# Altium PCB PCB_ASCII.PcbDoc
Units mil, origin at the board's own origin, x right, y up, seen from the top; angles counter-clockwise.
Board outline 2352.2 x 2352.2 mil, 2 copper layers (Top Layer, Bottom Layer); 85 components, 59 nets, 353 pads, 49 vias.
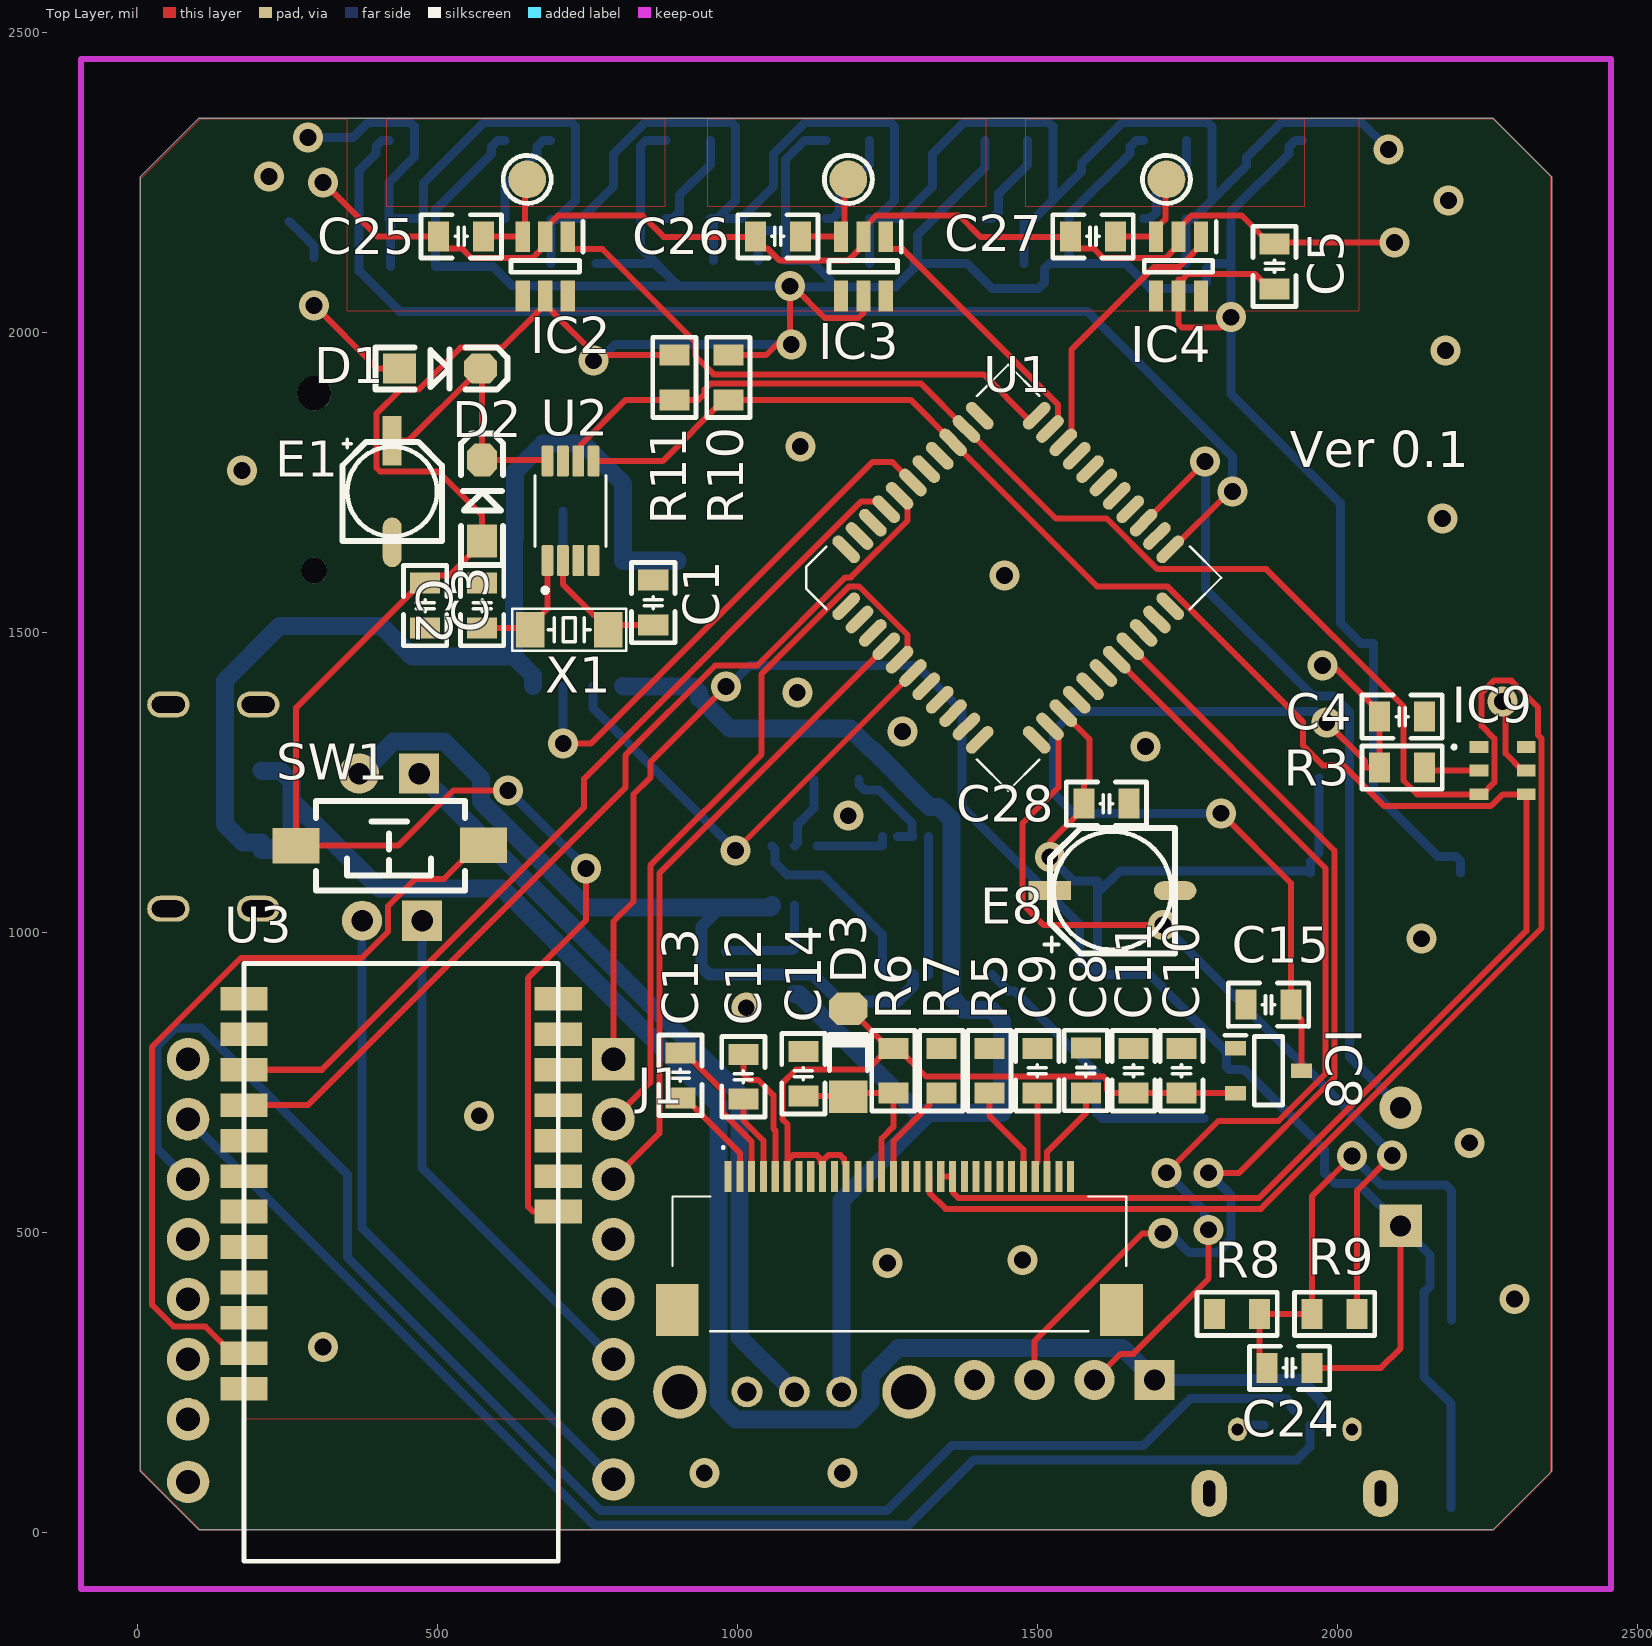
[diagram p0: Top Layer view]
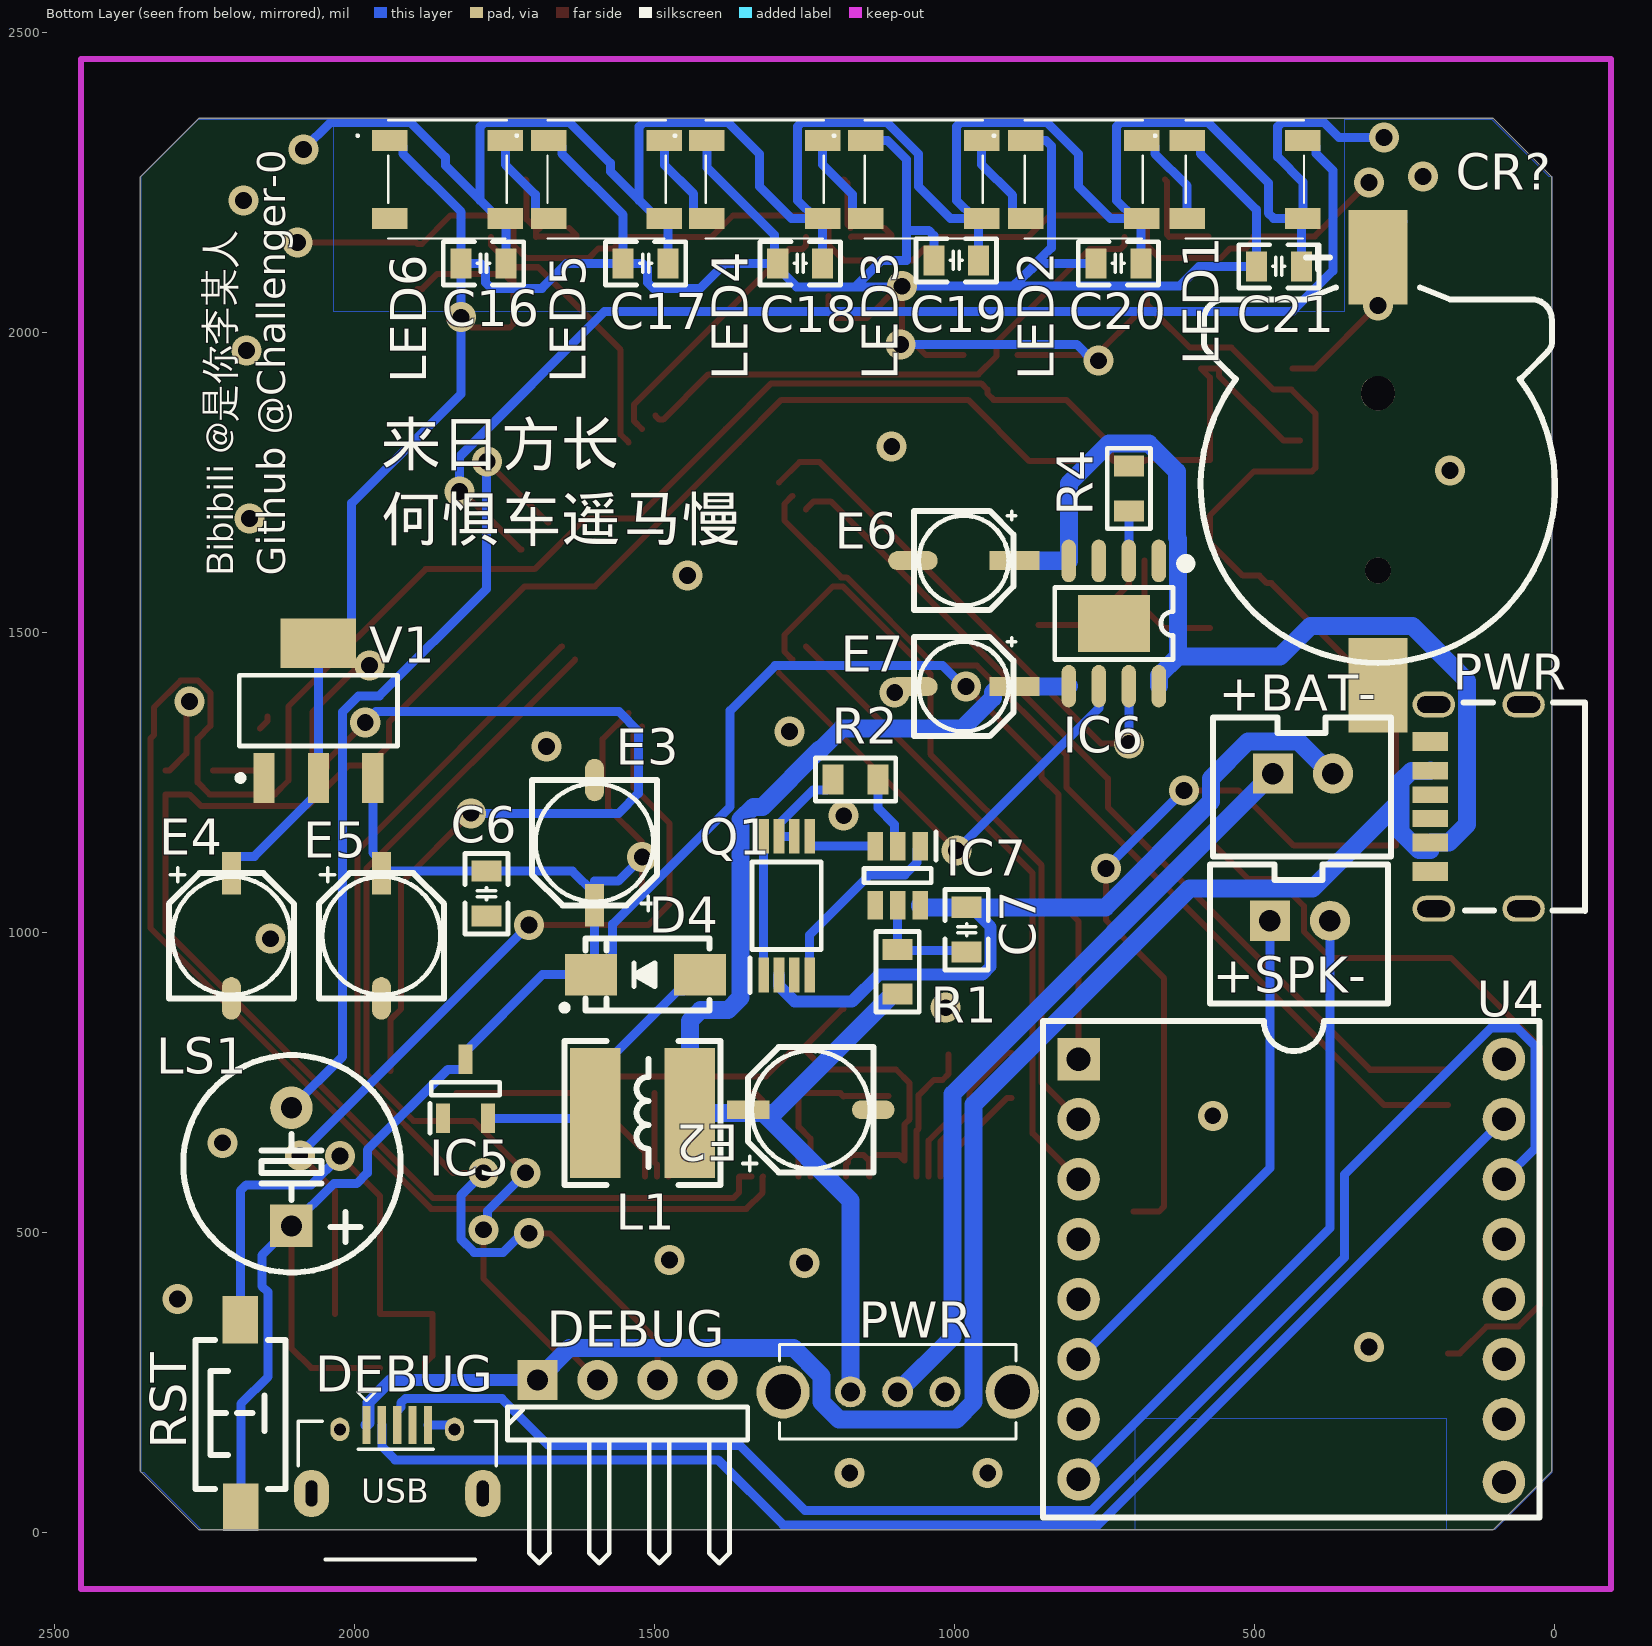
[diagram p1: Bottom Layer view, seen from below]

## Layer stack, top to bottom
Top Solder: solder mask 0.4, Solder Resist, Dk 3.5
Top Layer: signal copper 1.4
Dielectric 1: dielectric 12.6, FR-4, Dk 4.8
Bottom Layer: signal copper 1.4
Bottom Solder: solder mask 0.4, Solder Resist, Dk 3.5

## Board outline
5,103.43 5,2258.78 103.43,2357.2 2258.78,2357.2 2357.2,2258.78 2357.2,103.43 2258.78,5 103.43,5

## Design rules (kind name [scope] priority, off if disabled: settings)
AssemblyTestPointUsage [All] p0: scope1count=1 scope1_0_kind=Board scope1_0_value=Board scope2count=1 scope2_0_kind=Board scope2_0_value=Board commentlength=0
AssemblyTestpoint [All] p0: scope1count=1 scope1_0_kind=Board scope1_0_value=Board scope2count=1 scope2_0_kind=Board scope2_0_value=Board commentlength=0
Clearance Clearance_1 [All] p0 off: scope1count=1 scope1_0_kind=Board scope1_0_value=Board scope2count=1 scope2_0_kind=Board scope2_0_value=Board commentlength=44 gap=5 // Protel DXP Scope 2 Expression Was: IsPad
Clearance PadToPad [All] p0 off: scope1count=1 scope1_0_kind=Board scope1_0_value=Board scope2count=1 scope2_0_kind=Board scope2_0_value=Board commentlength=44 gap=5 // Protel DXP Scope 2 Expression Was: IsPad
Clearance [All] p0: scope1count=1 scope1_0_kind=Board scope1_0_value=Board scope2count=1 scope2_0_kind=Board scope2_0_value=Board commentlength=0 gap=5
Clearance Clearance_1 [IsNet vs IsPad] p1: gap=5 ignorepadtopadclearanceinfootprint=FALSE
Clearance PadToPad [IsPad vs IsPad] p2: gap=5 ignorepadtopadclearanceinfootprint=FALSE
Clearance [All] p3: gap=5 ignorepadtopadclearanceinfootprint=FALSE
ComponentClearance [All] p0: scope1count=1 scope1_0_kind=Board scope1_0_value=Board scope2count=1 scope2_0_kind=Board scope2_0_value=Board commentlength=0 gap=10 collisioncheckmode=3
DiffPairsRouting [All] p0: scope1count=1 scope1_0_kind=Board scope1_0_value=Board scope2count=1 scope2_0_kind=Board scope2_0_value=Board commentlength=0
FabricationTestPointUsage [All] p0: scope1count=1 scope1_0_kind=Board scope1_0_value=Board scope2count=1 scope2_0_kind=Board scope2_0_value=Board commentlength=0 valid=0 allowmultiple=FALSE
FabricationTestpoint [All] p0: scope1count=1 scope1_0_kind=Board scope1_0_value=Board scope2count=1 scope2_0_kind=Board scope2_0_value=Board commentlength=0 side=3 testpointundercomponent=TRUE minsize=40 maxsize=100 preferedsize=60 minholesize=0 maxholesize=40 preferedholesize=32 testpointgrid=1
FanoutControl Fanout_BGA [All] p0 off: scope1count=1 scope1_0_kind=Board scope1_0_value=Board scope2count=1 scope2_0_kind=Board scope2_0_value=Board commentlength=69 // Protel DXP Scope 1 Expression Was: IsBGA   Fanout_BGA (Default Rule)
FanoutControl Fanout_LCC [All] p0 off: scope1count=1 scope1_0_kind=Board scope1_0_value=Board scope2count=1 scope2_0_kind=Board scope2_0_value=Board commentlength=69 // Protel DXP Scope 1 Expression Was: IsLCC   Fanout_LCC (Default Rule)
FanoutControl Fanout_SOIC [All] p0 off: scope1count=1 scope1_0_kind=Board scope1_0_value=Board scope2count=1 scope2_0_kind=Board scope2_0_value=Board commentlength=71 // Protel DXP Scope 1 Expression Was: IsSOIC   Fanout_SOIC (Default Rule)
FanoutControl Fanout_Small [All] p0 off: scope1count=1 scope1_0_kind=Board scope1_0_value=Board scope2count=1 scope2_0_kind=Board scope2_0_value=Board commentlength=84 // Protel DXP Scope 1 Expression Was: (CompPinCount < 5)   Fanout_Small (Default Rule)
FanoutControl Fanout_Default [All] p0: scope1count=1 scope1_0_kind=Board scope1_0_value=Board scope2count=1 scope2_0_kind=Board scope2_0_value=Board commentlength=30 // Fanout_Default (Default Rule)
Height [All] p0: scope1count=1 scope1_0_kind=Board scope1_0_value=Board scope2count=1 scope2_0_kind=Board scope2_0_value=Board commentlength=0
HoleSize [All] p0: scope1count=1 scope1_0_kind=Board scope1_0_value=Board scope2count=1 scope2_0_kind=Board scope2_0_value=Board commentlength=0 absolutevalues=TRUE maxlimit=100 minlimit=1 maxpercent=80.000 minpercent=20.000
HoleToHoleClearance [All] p0: scope1count=1 scope1_0_kind=Board scope1_0_value=Board scope2count=1 scope2_0_kind=Board scope2_0_value=Board commentlength=0
LayerPairs [All] p0: scope1count=1 scope1_0_kind=Board scope1_0_value=Board scope2count=1 scope2_0_kind=Board scope2_0_value=Board commentlength=0 enforce=TRUE
MinimumSolderMaskSliver [All] p0: scope1count=1 scope1_0_kind=Board scope1_0_value=Board scope2count=1 scope2_0_kind=Board scope2_0_value=Board commentlength=0
MinimumSolderMaskSliver [All] p1: minsoldermaskwidth=2
NetAntennae [All] p0: scope1count=1 scope1_0_kind=Board scope1_0_value=Board scope2count=1 scope2_0_kind=Board scope2_0_value=Board commentlength=0
PasteMaskExpansion [All] p0: scope1count=1 scope1_0_kind=Board scope1_0_value=Board scope2count=1 scope2_0_kind=Board scope2_0_value=Board commentlength=0 expansion=0
PlaneClearance [All] p0: scope1count=1 scope1_0_kind=Board scope1_0_value=Board scope2count=1 scope2_0_kind=Board scope2_0_value=Board commentlength=0 clearance=20
PlaneConnect [All] p0: scope1count=1 scope1_0_kind=Board scope1_0_value=Board scope2count=1 scope2_0_kind=Board scope2_0_value=Board commentlength=0 planeconnectstyle=Relief reliefexpansion=20 reliefentries=4 reliefconductorwidth=10 reliefairgap=10
PolygonConnect [All] p0: scope1count=1 scope1_0_kind=Board scope1_0_value=Board scope2count=1 scope2_0_kind=Board scope2_0_value=Board commentlength=0 connectstyle=Relief reliefconductorwidth=10 reliefentries=4 polygonreliefangle="90 Angle"
PolygonConnect [All] p1: connectstyle=Relief reliefconductorwidth=10 reliefentries=4 polygonreliefangle="90 Angle" airgapwidth=10
RoutingCorners [All] p0: scope1count=1 scope1_0_kind=Board scope1_0_value=Board scope2count=1 scope2_0_kind=Board scope2_0_value=Board commentlength=0 cornerstyle=45-Degree minsetback=100 maxsetback=100
RoutingLayers [All] p0: scope1count=1 scope1_0_kind=Board scope1_0_value=Board scope2count=1 scope2_0_kind=Board scope2_0_value=Board commentlength=0 top layer=Automatic bottom layer=Automatic
RoutingPriority [All] p0: scope1count=1 scope1_0_kind=Board scope1_0_value=Board scope2count=1 scope2_0_kind=Board scope2_0_value=Board commentlength=0
RoutingTopology [All] p0: scope1count=1 scope1_0_kind=Board scope1_0_value=Board scope2count=1 scope2_0_kind=Board scope2_0_value=Board commentlength=0 topology=Shortest
RoutingVias [All] p0: scope1count=1 scope1_0_kind=Board scope1_0_value=Board scope2count=1 scope2_0_kind=Board scope2_0_value=Board commentlength=0 holewidth=28 width=50 viastyle="Through Hole" minholewidth=28 minwidth=50 maxholewidth=28 maxwidth=50
RoutingVias [All] p1: holewidth=28 width=50 viastyle="Through Hole" minholewidth=28 minwidth=50 maxholewidth=28 maxwidth=50
ShortCircuit [All] p0: scope1count=1 scope1_0_kind=Board scope1_0_value=Board scope2count=1 scope2_0_kind=Board scope2_0_value=Board commentlength=0 allowed=FALSE
SilkToBoardRegionClearance [All] p0: scope1count=1 scope1_0_kind=Board scope1_0_value=Board scope2count=1 scope2_0_kind=Board scope2_0_value=Board commentlength=0
SilkToSilkClearance [All] p0: scope1count=1 scope1_0_kind=Board scope1_0_value=Board scope2count=1 scope2_0_kind=Board scope2_0_value=Board commentlength=0
SilkToSilkClearance [All] p1: silktosilkclearance=0
SilkToSolderMaskClearance [All] p0 off: scope1count=1 scope1_0_kind=Board scope1_0_value=Board scope2count=1 scope2_0_kind=Board scope2_0_value=Board commentlength=44 // Protel DXP Scope 1 Expression Was: IsPad
SilkToSolderMaskClearance [IsPad] p1: minsilkscreentomaskgap=0 clearancetoexposedcopper=TRUE
SolderMaskExpansion [All] p0: scope1count=1 scope1_0_kind=Board scope1_0_value=Board scope2count=1 scope2_0_kind=Board scope2_0_value=Board commentlength=0 expansion=4
SolderMaskExpansion [All] p1: expansion=4 istentingtop=FALSE
UnRoutedNet [All] p0: scope1count=1 scope1_0_kind=Board scope1_0_value=Board scope2count=1 scope2_0_kind=Board scope2_0_value=Board commentlength=0
UnpouredPolygon [All] p0: scope1count=1 scope1_0_kind=Board scope1_0_value=Board scope2count=1 scope2_0_kind=Board scope2_0_value=Board commentlength=0
Width [All] p0: scope1count=1 scope1_0_kind=Board scope1_0_value=Board scope2count=1 scope2_0_kind=Board scope2_0_value=Board commentlength=0 maxlimit=50 minlimit=10 preferedwidth=30
Width [All] p1: maxlimit=50 minlimit=10 preferedwidth=30 toplayer_maxwidth=20 toplayer_prefwidth=10 minimp=50.000000 maximp=50.000000 favimp=50.000000
27 further rules are at their usual default settings.

## Classes and differential pairs
component class Sheet1: +BAT- +SPK- C1 C3 C4 C5 C6 C7 C8 C9 C10 C11 C12 C13 C14 C15 C16 C17 C18 C19 C20 C21 C24 C25 C26 C27 C28 CR? D1 D2 D3 D4 DEBUG E1 E2 E3 E4 E5 E6 E7 E8 IC2 IC3 IC4 IC5 IC6 IC7 IC8 IC9 J1 L1 LED1 LED2 LED3 LED4 LED5 LED6 LS1 PWR pwr Q1 R1 R2 R3 R4 R5 R6 R7 R8 R9 R10 R11 RST SW1 U1 U2 U3 U4 V1 X1

## Components (designator, comment, footprint, x,y, rotation, side; value= is the part's Value field where it differs from the comment)
+BAT- "HDR-1X2" XH2.54-LI-2P 420,1265 r180 bottom (schematic designator JP_BAT)
+SPK- "HDR-1X2" XH2.54-LI-2P 425,1020 r180 bottom (schematic designator JP_SPK)
C1 "15P" C0805_L 860,1550 r270 top
C2 "15P" C0805_L 575,1545 r90 top
C3 "104" C0805_L 480,1545 r90 top
C4 "104" C0805_L 2107.6,1360 r180 top
C5 "104" C0805_L 1895,2110 r270 top
C6 "104" C0805_L 1780,1065 r90 bottom
C7 "104" C0805_L 980,1005 r270 bottom
C8 "2.2uF" C0805_L 1580.64,770.43 r270 top
C9 "4.7uF" C0805_L 1500,770 r270 top
C10 "1uF" C0805_L 1740,770 r270 top
C11 "1uF" C0805_L 1660,770 r270 top
C12 "1uF" C0805_L 1010,760 r90 top
C13 "1uF" C0805_L 905,762.4 r90 top
C14 "4.7uF" C0805_L 1110,765 r270 top
C15 "104" C0805_L 1885,880 r0 top
C16 "104" C0805_L 1785,2115 r180 bottom
C17 "104" C0805_L 1515,2115 r180 bottom
C18 "104" C0805_L 1257.4,2115 r180 bottom
C19 "104" C0805_L 997.4,2120 r180 bottom
C20 "104" C0805_L 727.4,2115 r180 bottom
C21 "104" C0805_L 460,2110 r180 bottom
C24 "10uF" C0805_L 1920,275 r180 top
C25 "104" C0805_L 540,2160 r180 top
C26 "104" C0805_L 1067.6,2160 r180 top
C27 "104" C0805_L 1592.6,2160 r180 top
C28 "104" C0805_L 1615,1215 r0 top
CR? "1220" CR1220_A 295,1745 r90 bottom
D1 "稳压二极管" SOD-123 505,1940 r0 top
D2 "稳压二极管" SOD-123 575,1720 r90 top
D3 "1N4148" "MINI_MELF (LL34)" 1185,800 r90 top
D4 "SS14" SMA 1515,930 r0 bottom
DEBUG "USB2.0_Micro-B" USB2.0_MICRO-B_1 1928.82,65.83 r180 bottom (schematic designator MP3Player_Debug)
DEBUG "HDR-1X4" HDR2.54-WI-4P 1545,255 r180 bottom (schematic designator JP_DEBUG)
E1 "10uF/16V" "CE B(4*5.4)" 425,1735 r90 top
E2 "47uF/16V" "CE C(5*5.4)" 1240,705 r0 bottom
E3 "47uF/16V" "CE C(5*5.4)" 1600,1150 r270 bottom
E4 "47uF/16V" "CE C(5*5.4)" 2205,995 r90 bottom
E5 "47uF/16V" "CE C(5*5.4)" 1955,995 r90 bottom
E6 "10uF/16V" "CE B(4*5.4)" 985,1620 r180 bottom
E7 "10uF/16V" "CE B(4*5.4)" 985,1410 r180 bottom
E8 "47uF/16V" "CE C(5*5.4)" 1625,1070 r180 top
IC2 "TTP223-BA6" SOT95P285X126-6N 680,2110 r270 top
IC3 "TTP223-BA6" SOT95P285X126-6N 1210,2110 r270 top
IC4 "TTP223-BA6" SOT95P285X126-6N 1735,2110 r270 top
IC5 "ME2108A33M3G" SOT95P250X130-3N 1815,740 r90 bottom
IC6 "TP4056" SOIC-8_EP 735,1515 r270 bottom
IC7 "DW01A-G" SOT95P280X135-6N 1095,1095 r270 bottom
IC8 "XC6206P332MR" SOT95P280X130-3N 1885,770 r0 top
IC9 "AHT20" AHT20 2275,1270 r0 top
J1 "046288030000846+" 046288030000846 1270,465 r0 top
L1 "220uH" CD54 1520,700 r0 bottom
LED1 "WS2812B-B" WS2812BB 516.46,2254.96 r180 bottom
LED2 "WS2812B-B" WS2812BB 785,2254.96 r180 bottom
LED3 "WS2812B-B" WS2812BB 1051.46,2254.96 r180 bottom
LED4 "WS2812B-B" WS2812BB 1316.46,2254.96 r180 bottom
LED5 "WS2812B-B" WS2812BB 1580,2254.96 r180 bottom
LED6 "WS2812B-B" WS2812BB 1845,2254.96 r180 bottom
LS1 "DC5V" "BEEP 5x9x5.5" 2105,610 r180 bottom
PWR "S_BAT" SW_EG1213 1095,235 r180 bottom (schematic designator S)
PWR "USB_TYPE-C_6Pin" USB-C-SMD_6P 130,1210 r0 bottom (schematic designator USB1)
Q1 "FS8205A" SOP65P640X120-8N 1280,1045 r90 bottom
R1 "100R" R0805_L 1095,935 r270 bottom
R2 "1K" R0805_L 1165,1255 r0 bottom
R3 "1K" R0805_L 2107.6,1275 r0 top
R4 "1.2K" R0805_L 710,1740 r270 bottom
R5 "620K" R0805_L 1420,770 r270 top
R6 "1K" R0805_L 1260,770 r90 top
R7 "4.7K" R0805_L 1340,770 r270 top
R8 "10K" R0805_L 1832.6,365 r0 top
R9 "300R" R0805_L 1995,365 r0 top
R10 "4.7K" R0805_L 985,1925 r90 top
R11 "4.7K" R0805_L 895,1925 r90 top
RST "3x6x5" "SW SMD-3*6*2.5" 2190,200 r90 bottom (schematic designator SW_RST)
SW1 "3x6x5" "SW SMD-3*6*2.5" 420,1145 r180 top
TP1 "TEST" "TEST 1.6" 650,2255 r0 top
TP2 "TEST" "TEST 1.6" 1185,2255 r0 top
TP3 "TEST" "TEST 1.6" 1715,2255 r0 top
U1 "IAP15W4K58S4_LQFP44" LQFP44 1181.28,1543.99 r45 top
U2 "PCF8563TS/4,118" PCF8563TS/4,118 722.2,1702.87 r90 top
U3 "ATK_HC05" ATK_HC05 440,565 r180 top
U4 "XY5200" "DFPlayer Mini" 85,439.33 r180 bottom
V1 "AMS1117-3V3" SOT223_L 2060,1370 r90 bottom
X1 "" XTAL-3215-2P 720,1505 r0 top

## Footprints (in the part's own frame and the unit in brackets; to place one, negate y for a bottom-side part, rotate by r counter-clockwise, add the part's x,y. Pads: shape width x height; smd on the part's side, far side on the other; paste and mask are expansions set on the pad)
046288030000846 [mm]
  rect 0.3x1.3 smd: 1(-7.25,3.275) 2(-6.75,3.275) 3(-6.25,3.275) 4(-5.75,3.275) 5(-5.25,3.275) 6(-4.75,3.275) 7(-4.25,3.275) 8(-3.75,3.275) 9(-3.25,3.275) 10(-2.75,3.275) 11(-2.25,3.275) 12(-1.75,3.275) 13(-1.25,3.275) 14(-0.75,3.275) 15(-0.25,3.275) 16(0.25,3.275) 17(0.75,3.275) 18(1.25,3.275) 19(1.75,3.275) 20(2.25,3.275) 21(2.75,3.275) 22(3.25,3.275) 23(3.75,3.275) 24(4.25,3.275) 25(4.75,3.275) 26(5.25,3.275) 27(5.75,3.275) 28(6.25,3.275) 29(6.75,3.275) 30(7.25,3.275)
  rect 1.8x2.2 smd: MP1(-9.4,-2.375) MP2(9.4,-2.375)
  silkscreen extent -9.6,-3.27 9.6,4.55
AHT20 [mm]
  rect 0.8x0.5 smd: 1(-1,1) 2(-1,0) 3(-1,-1) 4(1,-1) 5(1,0) 6(1,1)
  silkscreen extent -2.1,0.95 -2,1.05
ATK_HC05 [mm] "欢迎光临https://shop463601444.taobao.com 掌柜ID：黄晶宝石"
  rect 2x1 smd: 1(-6.65,0.75) 2(-6.65,-0.75) 3(-6.65,-2.25) 4(-6.65,-3.75) 5(-6.65,-5.25) 6(-6.65,-6.75) 7(-6.65,-8.25) 8(6.65,-8.25) 9(6.65,-6.75) 10(6.65,-5.25) 11(6.65,-3.75) 12(6.65,-2.25) 13(6.65,-0.75) 14(6.65,0.75) 15(6.65,2.25) 16(6.65,3.75) 17(6.65,5.25) 18(6.65,6.75) 19(6.65,8.25)
  silkscreen extent -6.65,-9.75 6.65,15.55
"BEEP 5x9x5.5" [mm] "5*9*5.5mm(脚距,直径,高度)        淘宝ID:黄晶宝石"
  rect 1.8x1.8 hole 0.9: 1(0,-2.5)
  round 1.8 hole 0.9: 2(0,2.5)
  silkscreen extent -4.58,-4.47 4.62,4.72
C0805_L [mil] "贴片MLCC电容"
  rect 35x50 smd: 1(-37.4,0) 2(37.4,0)
  silkscreen extent -67,-36 67,36
CD54 [mm] "5.8*5.2*4.5mm（长宽高）        淘宝ID:黄晶宝石"
  rect 2.15x5.5 smd: 1(-2,0) 2(2,0)
  silkscreen extent -3.3,-3.05 3.3,3.05
"CE B(4*5.4)" [mm] "贴片电解电容，直径4mm，高5.4mm"
  rect 2.1x0.8 smd: 1(2.15,0)
  oval 2.1x0.8 smd: 2(-2.15,0)
  silkscreen extent -2.1,-2.1 2.2,2.1
"CE C(5*5.4)" [mm] "贴片电解电容，直径5mm，高5.4mm"
  rect 1.8x0.8 smd: 1(2.65,0)
  oval 1.8x0.8 smd: 2(-2.65,0)
  silkscreen extent -2.65,-2.65 2.88,2.65
CR1220_A [mm] "纽扣电池座                         淘宝ID:黄晶宝石"
  round 1.1 hole 1.1: 0(-3.6,0)
  round 1.45 hole 1.45: 0(3.9,0)
  rect 4x2.5 smd: 1(9.652,0) 2(-8.458,0)
  silkscreen extent -7.5,-7.5 10.16,7.5
"DFPlayer Mini" [mm] "长：21mm ， 宽： 21mm，高：6mm"
  rect 1.8x1.8 hole 1: 1(-18,8.89)
  round 1.8 hole 1: 2(-18,6.35) 3(-18,3.81) 4(-18,1.27) 5(-18,-1.27) 6(-18,-3.81) 7(-18,-6.35) 8(-18,-8.89) 9(0,-9) 10(0,-6.35) 11(0,-3.81) 12(0,-1.27) 13(0,1.27) 14(0,3.81) 15(0,6.35) 16(0,8.89)
  silkscreen extent -19.5,-10.5 1.5,10.5
HDR2.54-WI-4P [mm] "弯脚排针，4脚"
  rect 1.7x1.7 hole 0.9: 1(-3.81,0)
  round 1.7 hole 0.9: 2(-1.27,0) 3(1.27,0) 4(3.81,0)
  silkscreen extent -5.08,-7.76 5.08,-1.14
LQFP44 [mm]
  oval 1.45x0.5 smd: 1(0,0) 2(0,-0.8) 3(0,-1.6) 4(0,-2.4) 5(0,-3.2) 6(0,-4) 7(0,-4.8) 8(0,-5.6) 9(0,-6.4) 10(0,-7.2) 11(0,-8) 23(11.4,-8) 24(11.4,-7.2) 25(11.4,-6.4) 26(11.4,-5.6) 27(11.4,-4.8) 28(11.4,-4) 29(11.4,-3.2) 30(11.4,-2.4) 31(11.4,-1.6) 32(11.4,-0.8) 33(11.4,0)
  oval 0.5x1.45 smd: 12(1.7,-9.7) 13(2.5,-9.7) 14(3.3,-9.7) 15(4.1,-9.7) 16(4.9,-9.7) 17(5.7,-9.7) 18(6.5,-9.7) 19(7.3,-9.7) 20(8.1,-9.7) 21(8.9,-9.7) 22(9.7,-9.7) 34(9.7,1.7) 35(8.9,1.7) 36(8.1,1.7) 37(7.3,1.7) 38(6.5,1.7) 39(5.7,1.7) 40(4.9,1.7) 41(4.1,1.7) 42(3.3,1.7) 43(2.5,1.7) 44(1.7,1.7)
  silkscreen extent -0.68,-10.38 12.07,2.38
"MINI_MELF (LL34)" [mm] "1.5*3.4mm(直径，脚距）"
  rect 1.37x1.62 smd: 1(-1.855,0)
  oct 1.37x1.62 smd: 2(1.855,0)
  silkscreen extent -0.76,-0.8 0.78,0.8
PCF8563TS/4,118 [mm]
  rrect25% 1.31x0.5 smd: 1(-2.105,0.975) 2(-2.105,0.325) 3(-2.105,-0.325) 4(-2.105,-0.975) 5(2.105,-0.975) 6(2.105,-0.325) 7(2.105,0.325) 8(2.105,0.975)
  silkscreen extent -3.47,-1.5 1.5,1.5
R0805_L [mil] "1/8W贴片电阻"
  rect 35x50 smd: 1(-37.4,0) 2(37.4,0)
  silkscreen extent -67,-36 67,36
SMA [mm] "4.5x2.6*2.2mm（长宽高，不包括引脚）"
  rect 2.2x1.75 smd: 1(-2.3,0) 2(2.3,0)
  silkscreen extent -2.7,-1.52 3.56,1.52
SOD-123 [mil] "2.7x1.6X1.1mm（长宽高，不包括引脚） 淘宝ID:黄晶宝石"
  rect 55x50 smd: 1(-67.5,0)
  oct 55x50 smd: 2(67.5,0)
  silkscreen extent -108,-35 112,35
SOIC-8_EP [mm] "5*6*1.8mm（长宽高"
  oval 1.8x0.61 smd: 1(-2.65,1.905) 2(-2.65,0.635) 3(-2.65,-0.635) 4(-2.65,-1.905) 5(2.65,-1.905) 6(2.65,-0.635) 7(2.65,0.635) 8(2.65,1.905)
  rect 2.413x3.048 smd paste-2: 9(0,0)
  rect 0.9x0.7 on Bottom Paste: 10(-0.625,-1.1) 10(-0.625,0) 10(-0.625,1.1) 11(0.65,-1.1) 11(0.65,0) 11(0.65,1.1)
  silkscreen extent -2.69,-2.5 1.52,3.2
SOP65P640X120-8N [mm]
  rect 1.475x0.45 smd: 1(-2.938,0.975) 2(-2.938,0.325) 3(-2.938,-0.325) 4(-2.938,-0.975) 5(2.938,-0.975) 6(2.938,-0.325) 7(2.938,0.325) 8(2.938,0.975)
  silkscreen extent -3.67,-1.47 1.85,1.55
SOT95P250X130-3N [mm]
  rect 1.25x0.6 smd: 1(-1.25,0.95) 2(-1.25,-0.95) 3(1.25,0)
  silkscreen extent -1.87,-1.45 0.27,1.5
SOT95P280X130-3N [mm]
  rect 0.9x0.6 smd: 1(-1.4,0.95) 2(-1.4,-0.95) 3(1.4,0)
  silkscreen extent -1.85,-1.45 0.6,1.5
SOT95P280X135-6N [mm]
  rect 1.2x0.65 smd: 1(-1.25,0.95) 2(-1.25,0) 3(-1.25,-0.95) 4(1.25,-0.95) 5(1.25,0) 6(1.25,0.95)
  silkscreen extent -1.85,-1.42 0.3,1.62
SOT95P285X126-6N [mm]
  rect 1.3x0.6 smd: 1(-1.25,0.95) 2(-1.25,0) 3(-1.25,-0.95) 4(1.25,-0.95) 5(1.25,0) 6(1.25,0.95)
  silkscreen extent -1.9,-1.45 0.25,1.6
SOT223_L [mm] "SOT223, 4-Leads, Body 6.5x3.5mm, Pitch 2.3mm, Lead Span 7mm, IPC High Density"
  rect 2.1x0.9 smd: 1(-2.85,2.3) 2(-2.85,0) 3(-2.85,-2.3)
  rect 2.1x3.2 smd: 4(2.85,0)
  silkscreen extent -2.97,-3.35 1.5,3.43
"SW SMD-3*6*2.5" [mm] "3*6*2.5mm"
  rect 2x1.5 smd: 1(-3.996,-0.02) 2(3.937,0)
  silkscreen extent -3.21,-1.9 3.09,1.9
SW_EG1213 [mm]
  round 1.308 hole 0.8: 1(-2,0) 2(0,0) 3(2,0)
  round 2.25 hole 1.5: P$4(-4.85,0) P$5(4.85,0)
  silkscreen extent -5,-2 5,2
"TEST 1.6" [mm] "测试点1.6mm"
  round 1.6 smd paste-1.6: 1(0,0)
  silkscreen extent -1.01,-1.02 1.02,1.02
USB2.0_MICRO-B_1 [mm] "micro型USB ，5.7*7.8*2.5mm  封装库来自淘宝ID:黄晶宝石"
  rect 0.35x1.6 smd: 1(-1.3,2.9) 2(-0.65,2.9) 3(0,2.9) 4(0.65,2.9) 5(1.3,2.9)
  oval 1.5x2 hole 0.5 slot 1.1 at 90 deg: 5(-3.625,0) 5(3.625,0)
  oval 0.8x1 hole 0.5: 5(-2.425,2.71) 5(2.425,2.71)
  silkscreen extent -4.19,-2.79 4.19,4.3
USB-C-SMD_6P [mil] "封装库来自淘宝ID:黄晶宝石"
  oval 70.82x43.31 hole 27.56 slot 55.16 at 0 deg: 0(-77.75,-170.08) 0(-77.75,170.08) 0(71.85,-170.08) 0(71.85,170.08)
  rect 59x27.6 smd: A5(77.76,19.7) B5(77.76,-19.7)
  rect 59x29.9 smd: A9(77.76,-59.85) B9(77.76,59.85)
  rect 59x31.5 smd: A12(77.76,-108.25) B12(77.76,108.25)
  silkscreen extent -180,-174 22,174
WS2812BB [mm]
  rect 1.5x0.9 smd: 1(-2.45,1.65) 2(-2.45,-1.65) 3(2.45,-1.65) 4(2.45,1.65)
  silkscreen extent -3.85,-2.5 2.5,2.5
XH2.54-LI-2P [mm] "接插件，2P"
  rect 1.7x1.7 hole 0.9: 1(-1.27,0)
  round 1.7 hole 0.9: 2(1.27,0)
  silkscreen extent -3.81,-3.51 3.74,2.37
XTAL-3215-2P [mm] "3.2*1.5*0.6mm(长宽高)"
  rect 1.2x1.5 smd: 1(-1.65,0) 2(1.65,0)
  silkscreen extent -2.41,-0.89 2.41,0.89

## Part data
+BAT- +SPK-: library part "Header 2", "2P接插件"
C1 C2 C3 C4 C5 C6 C7 C8 C9 C10 C11 C12 C13 C14 C15 C16 C17 C18 C19 C20 C21 C24 C25 C26 C27 C28: library part C, "贴片电容"
CR?: library part CR-3V, "微型电池"
D1 D2: "Zener Diode"
D3: "开关二极管"
D4: "肖特基二极管"
DEBUG: "USB2.0_Micro-B母座"
DEBUG: library part "Header 4", "4P接插件"
E1 E2 E3 E4 E5 E6 E7 E8: library part CE_SMD, "贴片电解电容"
IC2 IC3 IC4 IC5 IC7 IC8 IC9: "Integrated Circuit"
IC6: "锂电池充电管理"
J1: "Connector"
L1: library part L-SMD, "CD系列贴片线绕功率电感"
LED1 LED2 LED3 LED4 LED5 LED6: "LED"
LS1: library part BEEP, "蜂鸣器"
PWR: library part EG1213, "Slide Switch SPDT Through Hole, Right Angle"
PWR: "USB_TYPE-C_6Pin母座"
Q1: "MOSFET (N-Channel)"
R1 R2 R3 R4 R5 R6 R7 R8 R9 R10 R11: library part R, "贴片电阻"
RST SW1: library part "SW 3x6", "3x6轻触开关"
TP1 TP2 TP3: "测试点"
U1: library part STC15W4K60S4_LQFP44
U2: "RTC circuit; I2C; 1.8?·5.5VDC; TSSOP8"
U3: "蓝牙模块"
U4: library part "Mini MP3 Player", "MP3模块"
V1: library part AMS1117, "三端稳压芯片"
X1: library part XTAL-2P, "2脚无源晶振(谐振器）"

## Via types
v1: diameter 50, hole 28, Top Layer to Bottom Layer, tented both sides, 49 vias

## Nets (pads, with @x,y where several pads share a name; then routed paths per layer and width w, separated by ;. In a path a pad name is that pad's centre, name@x,y a point inside that pad or via, vN(x,y) a via of type N, cw(c..) or ccw(c..) an arc to the next point about the centre after c; other vN are vias at no path point)
3V3: C3.2 C4.2 C5.2 C15.2 C16.1 C17.1 C18.1 C19.1 C20.1 C21.1 D2.1 E4.1 IC2.5 IC3.5 IC4.5 IC8.3 LED1.1 LED2.1 LED3.1 LED4.1 LED5.1 LED6.1 R3.1 R10.2 R11.2 SW1.2 U3.1 V1.2 V1.4 | length 10210.1
  Top Layer w10: v1(618,1237) 527,1237 435,1145 SW1.2 265,1374.89 472.5,1582.4 C3.2 492.5,1594.9 519.9,1594.9 575,1650 D2.1 575,1695 501.69,1768.31 405.11,1768.31 399.25,1774.17 399.25,1865.13 439.13,1905 469.14,1905 539.14,1975 608.35,1975 665.62,2032.27 665.62,2032.63 IC2.5@680,2047.01 ; IC2.5@680,2074.57 IC2.5 IC2.5@680,2047.01 ; U3.1 659.53,535.47 651,544 651,924 748,1021 v1(748,1107) ; R11.2 764.25,1962.4 694.38,2032.27 694.38,2032.63 IC2.5@680,2047.01 ; R10.2 1048,1962.4 1088,2002.4 v1(1088,2077) ; v1@1093,2077 1146,2024 1202,2024 1210,2032 IC3.5 ; v1(1806,1199) 1922.4,1082.6 C15.2 1922.4,872.5 1940.12,854.78 IC8.3 ; v1(1822.4,2025.4) 1805,2008 1741,2008 1735,2014 IC4.5 1735,2088 1741,2088 1750,2097 1862.6,2097 1887,2072.6 C5.2 ; v1(1975,1445) 1982.65,1437.35 2000.35,1437.35 2070.2,1367.5 C4.2 R3.1 2046,1275 2046,1286 v1(1982,1350)
  Bottom Layer w15: LED1.1 601.1,2319.92 590.89,2309.71 590.89,2297.89 497.4,2204.41 C21.1 592.62,2110 625.62,2077 v1(1088,2077) 1089,2076 1165.32,2076 ; v1(618,1237) v1(748,1107) ; v1(760.35,1952.98) 769.82,1952.98 796.84,1980 v1(1090,1980) ; C20.1 861.32,2115 901,2079 839,2141 839,2310.92 848,2319.92 LED2.1 ; C19.1 1034.8,2161.21 1043.59,2170 1080,2170 ; LED3.1 1112,2319.92 1080,2287.92 1080,2170 ; C18.1@1300.26,2120.45 1300.26,2162.5 1412.91,2275.16 LED4.1 ; LED5.1 1664.65,2319.92 1654.43,2309.71 1654.43,2297.89 1552.4,2195.87 C17.1 ; v1(1806,1199) 1560,1199 1527,1232 1527,1336 1559.25,1368.25 1963.75,1368.25 v1(1982,1350) ; LED6.1 1929.65,2319.92 1919.43,2309.71 1919.43,2297.89 1822.4,2200.87 C16.1 ; E4.1 2205,1119.02 2196.75,1127.26 2166.91,1127.26 2060,1234.17 V1.2 V1.4 2038.35,1482.2 2004.51,1516.04 2004.51,1715.72 1822.4,1897.82 v1(1822.4,2025.4) C16.1 ; 1080,2170 1080,2120 1121.32,2120 1165.32,2076 ; 1165.32,2076 1263.3,2076 1294.8,2107.5 C18.1 1382.62,2115 1424.12,2073.5 1501.94,2073.5 1511.6,2083.16 1511.6,2106.21 1520.39,2115 C17.1 ; C17.1 1646.42,2115 1687.92,2073.5 1771.94,2073.5 1781.6,2083.16 1781.6,2106.21 1790.39,2115 C16.1
+5: C6.2 C24.1 C28.1 D4.2 E3.1 E5.1 E8.1 IC5.3 LS1.1 RST.1 U1.14 U4.1 V1.3 | length 4396.6
  Top Layer w10: U4.1 793.66,1018.66 827,1052 827,1230.35 855,1258.35 855,1284 v1(981,1410) ; E8.1 v1(1520.67,1126) 1520.67,1150.57 1577.6,1207.5 C28.1 1577.6,1247.18 1586.71,1256.3 1586.71,1322.3 U1.14 ; C24.1 2072,275 2105,308 LS1.1
  Bottom Layer w15: v1(981,1410) 985,1410 1020,1445 1299,1445 1374,1370 1374,1210.12 1569.74,1014.38 1569.74,956.95 1596.69,930 D4.2 ; v1(1520.67,1126) 1560.67,1086 1600,1086 E3.1@1600,1065.36 ; V1.3 1969.45,1133.46 1955,1119.02 E5.1 1951.93,1102.4 C6.2 1637.04,1102.4 E3.1@1600,1065.36 ; RST.1 2189.21,215.26 2143.97,260.5 2143.97,401.2 2154.15,411.38 2154.15,462.43 LS1.1 2034.48,582.1 1996.25,582.1 1978.35,600 1978.35,638.23 1844.47,772.11 1819.31,772.11 1815,776.42 IC5.3 1815,802.01 1687.01,930 D4.2 ; E3.1@1600,1065.36 E3.1 1600,935.55 D4.2
BAT+: E2.1 E7.1 IC6.5 L1.1 PWR.1 R1.2 | length 2147.9
  Bottom Layer w30: IC6.5 810.34,1410.34 900.02,1410.34 E7.1 925.94,1410 936,1399.94 936,1391.36 987.54,1339.82 1188.36,1339.82 1223.19,1305 1225,1305 1320.29,1209.71 1335.53,1209.71 1356.55,1188.69 1356.55,891.86 1377.57,870.84 1423.69,870.84 1441.26,853.27 L1.1 E2.1@1319.64,700 ; R1.2 1102.5,897.6 1300.11,700 E2.1@1319.64,700 ; PWR.1 1173.74,554.1 E2.1@1319.64,700
BAT+_2: +BAT-.1 PWR.2 | length 1288.9
  Bottom Layer w30: +BAT-.1 1003.35,731.65 1003.35,326.65 PWR.2
BAT-: +BAT-.2 C7.1 IC7.6 Q1.2 Q1.3 | length 1366.7
  Bottom Layer w20: C7.1@972.5,1042.4 940,1009.9 940,943.89 953.79,930.1 1126.22,930.1 1171.02,885.29 1266.65,885.29 1292.8,911.44 Q1.2
  Bottom Layer w30: +BAT-.2 374.04,1265 427.5,1318.46 511.75,1318.46 573,1257.21 573,1218.36 748.96,1042.4 972.5,1042.4 C7.1 1055.39,1042.4 1057.6,1044.61 IC7.6
BEP: LS1.2 U1.25 | length 1376.6
  Top Layer w10: U1.25 1677.5,1683.19 v1(1779.31,1785)
  Bottom Layer w15: v1(1779.31,1785) 1780,1784.31 1780,1572.8 1958.34,1394.46 1993.2,1394.46 2019.67,1368 2019.67,793.76 LS1.2
BT_RX: U1.41 U3.10 | length 1495.7
  Top Layer w10: U3.10 307.77,771.69 744.94,1208.87 744.94,1256.81 1206.81,1718.68 1234.87,1718.68 U1.41
BT_TX: U1.40 U3.11 | length 1587
  Top Layer w10: U3.11 284.43,712.64 813.6,1241.81 813.6,1295.58 963.16,1445.15 1033.16,1445.15 1180.07,1592.06 1189.2,1592.06 1283.59,1686.44 1283.59,1714.5 U1.40
CRGS_CG: IC6.7 U1.39 | length 886.7
  Top Layer w10: v1(710,1315) 756,1315 1225,1784 1258.64,1784 U1.39
  Bottom Layer w15: v1(710,1315) IC6.7
CRGS_CP: IC6.6 U1.6 | length 789.9
  Top Layer w10: v1(997,1137) U1.6
  Bottom Layer w15: IC6.6 760,1374 v1(997,1137)
Debug_RX: DEBUG.2@1595,255 U1.18 | length 1632.6
  Top Layer w10: DEBUG.2@1595,255 1638.46,298.46 1659.93,298.46 1785,423.54 v1(1785,505) v1@1778.3,511.7 ; U1.18 1980,1107.18 1980,765 1901.33,686.33 1801.33,686.33 v1(1715,600)
  Bottom Layer w15: v1(1715,600) 1778.3,536.7 v1@1778.3,511.7
Debug_TX: DEBUG.3@1495,255 U1.19 | length 1754.6
  Top Layer w10: DEBUG.3@1495,255 1495,319.3 1675,499.3 v1(1709.3,499.3) ; U1.19 1995,1136.72 1995,758.79 1836.21,600 v1(1785,600)
  Bottom Layer w15: v1(1709.3,499.3) 1715,505 1752.5,467.5 1800.53,467.5 1822.5,489.47 1822.5,562.5 v1(1785,600)
GND: C1.1 C2.2 C3.1 C4.1 C5.1 C6.1 C8.1 C9.1 C10.1 C11.1 C14.1 C15.1 C16.2 C17.2 C18.2 C19.2 C20.2 C21.2 C25.2 C26.2 C27.2 C28.2 CR?.2 DEBUG.4@1395,255 DEBUG.5 E1.2 E2.2 E3.2 E4.2 E5.2 E6.2 E7.2 E8.2 IC2.2 IC3.2 IC4.2 IC5.1 IC6.1 IC6.3 IC8.1 IC9.5 J1.1 J1.8 J1.10 J1.12 J1.13 J1.16 J1.17 J1.21 J1.22 J1.23 J1.24 J1.25 J1.29 J1.30 LED1.3 LED2.3 LED3.3 LED4.3 LED5.3 LED6.3 PWR.0 PWR.A12 PWR.B12 Q1.6 Q1.7 R2.2 R4.1 R5.1 R7.1 R8.1 U1.16 U2.4 U3.7 U3.8 U4.7 U4.10 V1.1 | length 6432.3
  Top Layer w10: v1(310,2250) 400,2160 C25.2 502.6,2152.5 515.1,2140 540.76,2140 557.14,2123.62 658.55,2123.62 665.62,2130.69 665.62,2131.05 680,2145.43 IC2.2 680,2172.99 694.38,2187.37 694.38,2187.73 701.45,2194.8 841.78,2194.8 877.37,2159.21 1029.41,2159.21 C26.2 1030.2,2152.5 1042.7,2140 1050.2,2140 1070.2,2120 1184.93,2120 1195.62,2130.69 1195.62,2131.05 1210,2145.43 IC3.2 1210,2172.99 1224.38,2187.37 1224.38,2187.73 1231.45,2194.8 1369.28,2194.8 1404.87,2159.21 1554.41,2159.21 C27.2 1555.2,2152.5 1567.7,2140 1593.36,2140 1609.74,2123.62 1713.55,2123.62 1720.62,2130.69 1720.62,2131.05 1735,2145.43 IC4.2 1735,2172.99 1749.38,2187.37 1749.38,2187.73 1756.45,2194.8 1840.1,2194.8 1887.5,2147.41 C5.1 1897.59,2150 v1(2095,2150) ; C4.1 2145,1352.5 C4.1@2157.5,1340 ; v1@2280,1365 2280,1298.46 2308.46,1270 IC9.5
  Bottom Layer w15: v1(285,2325) 360.16,2325 385.29,2350.14 454.71,2350.14 462.03,2342.82 462.03,2292.53 420,2250.5 LED1.3 ; C21.2 422.6,2187.4 LED1.3 ; C20.2 690,2188.54 698.9,2188.54 LED2.3@700.36,2190 ; C19.2 960,2185 LED3.3 LED3.3@966.81,2190 ; R2.2 1202.4,1247.5 1212.4,1237.5 1236.14,1237.5 1291.44,1182.21 1291.44,1162.03 Q1.7 Q1.6 ; C18.2 LED4.3 LED4.3@1231.81,2190 ; C17.2 1477.6,2184.06 LED5.3 1495.36,2190 1525.57,2220.22 ; C16.2 1747.6,2189.06 1759.41,2189.06 1790.57,2220.22 ; DEBUG.5@1833.35,172.52 1833.87,172.52 1841.35,180 DEBUG.5@1877.64,180 ; v1(2085,2305) 2039.86,2350.14 1906.75,2350.14 1848.66,2292.05 1848.66,2278.31 1790.57,2220.22 ; LED1.3 468.62,2190 477.4,2198.79 477.4,2249.33 578.21,2350.14 723.25,2350.14 730.57,2342.82 730.57,2220.22 LED2.3@700.36,2190 ; LED2.3@700.36,2190 740.57,2190 793.66,2243.09 793.66,2297.05 846.75,2350.14 989.71,2350.14 997.03,2342.82 997.03,2220.22 LED3.3@966.81,2190 ; LED3.3@966.81,2190 1007.03,2190 1060,2242.97 1060,2296.93 1113.21,2350.14 1254.71,2350.14 1262.03,2342.82 1262.03,2220.22 LED4.3@1231.81,2190 ; LED4.3@1231.81,2190 1272.03,2190 1325.12,2243.09 1325.12,2297.05 1378.21,2350.14 1518.25,2350.14 1525.57,2342.82 1525.57,2220.22 ; 1525.57,2220.22 1573.66,2268.31 1573.66,2282.05 1641.75,2350.14 1783.25,2350.14 1790.57,2342.82 1790.57,2220.22
  other v1: 945,100 1175,100 310,310 2295,390 1250,450 1475,455 2220,650 570,695 1015,875 2140,990 1185,1195 1680,1310 1275,1335 2275,1385 1100,1400 1445,1595 2175,1690 175,1770 1105,1810 2180,1970 2185,2220 220,2260
IAP15_RST: R9.2 U1.13 | length 1405.2
  Top Layer w10: U1.13 1535,1329.47 1535,1242 1475,1182 1475,1048 1510,1013 v1(1709,1013) ; R9.2 2032.4,570.4 v1(2091,629)
  Bottom Layer w15: v1(1709,1013) 2091,631 v1(2091,629)
LED_IN: LED1.4 U1.23 | length 2029.9
  Top Layer w10: U1.23 1723.98,1638.64 1820.33,1735 v1(1825,1735)
  Bottom Layer w15: LED1.4 408.19,2319.92 397.97,2309.71 397.97,2297.89 370,2269.92 370,2102.42 437.42,2035 1583.03,2035 1825,1793.03 v1(1825,1735)
MP3Player_RX: U1.5 U4.2 | length 1227.9
  Top Layer w10: U4.2 855,750.67 855,1112.13 1040.49,1297.62 1040.49,1431.26 1186.29,1577.06 1202.72,1577.06 1283.59,1496.19 1283.59,1468.13 U1.5
MP3Player_TX: U1.4 U4.3 | length 1076.1
  Top Layer w10: U4.3 870,665.67 870,1099.09 U1.4
NetC1_2: C1.2 U2.2 X1.2 | length 227.9
  Top Layer w10: U2.2 709.41,1580.55 760.43,1529.53 766.34,1529.53 784.96,1510.91 X1.2 792.56,1512.6 C1.2
NetC2_1: C2.1 U2.1 X1.1 | length 208
  Top Layer w10: C2.1 652.44,1507.6 X1.1 655.04,1510.91 683.82,1539.68 U2.1
NetC7_2: C7.2 IC7.5 R1.1 | length 190.4
  Bottom Layer w15: C7.2 982.41,970 1092.6,970 R1.1 IC7.5
NetC8_2: C8.2 J1.28 | length 165.8
  Top Layer w10: J1.28 1516.06,634.79 1580.64,699.37 C8.2
NetC9_2: C9.2 J1.27 | length 140.2
  Top Layer w10: J1.27 1496.38,613.62 1500,617.24 C9.2
NetC12_1: C12.1 J1.4 | length 142.6
  Top Layer w10: C12.1 1010,687.17 1043.62,653.55 J1.4
NetC12_2: C12.2 J1.5 | length 233.9
  Top Layer w10: C12.2 1010,764.9 1020.33,754.57 1034.67,754.57 1060,729.25 1060,673.54 1063.31,670.23 J1.5
NetC13_1: C13.1 J1.2 | length 176.6
  Top Layer w10: C13.1 912.5,725 1004.25,633.25 J1.2
NetC13_2: C13.2 J1.3 | length 259.5
  Top Layer w10: C13.2 912.5,799.8 975,737.3 975,700.95 1023.94,652.02 J1.3
NetC14_2: C14.2 D3.1 J1.14 R6.1 | length 299.4
  Top Layer w10: C14.2 1184.37,727.6 D3.1 1190.63,732.6 R6.1 1260,676.63 1240.47,657.09 J1.14
NetC24_2: C24.2 R8.2 R9.1 RST.2 | length 878.3
  Top Layer w10: C24.2 1882.6,282.5 1870,295.11 R8.2 R9.1 1957.6,561.6 v1(2024,628)
  Bottom Layer w15: v1(2024,628) 2072,580 2180,580 2190,570 RST.2
NetC25_1: C25.1 IC2.3 TP1.1 | length 164.4
  Top Layer w10: C25.1 641.81,2160 IC2.3 646.3,2162.91 646.3,2251.3 TP1.1
NetC26_1: C26.1 IC3.3 TP2.1 | length 173
  Top Layer w10: C26.1@1117.5,2174.21 1105,2161.71 C26.1 1171.81,2160 IC3.3 ; IC3.3@1173.21,2174.21 1178.8,2179.8 1178.8,2248.8 TP2.1
NetC27_1: C27.1 IC4.3 TP3.1 | length 199.9
  Top Layer w10: C27.1@1642.5,2174.21 1630,2161.71 C27.1 1696.81,2160 IC4.3 IC4.3@1697.6,2167.4 ; IC4.3@1690.79,2174.21 IC4.3@1697.6,2167.4 ; TP3.1 1713.19,2253.19 1713.19,2188.58 1697.6,2172.99 IC4.3@1697.6,2167.4
NetCR?_1: CR?.1 D1.1 | length 263.3
  Top Layer w10: v1(295,2045) 400,1940 D1.1
  Bottom Layer w15: CR?.1@253.29,2185 295,2143.29 CR?.1
NetD1_2: D1.2 D2.2 E1.1 U2.8 | length 490.4
  Top Layer w10: E1.1 452.15,1819.65 560,1927.5 560,1940 D1.2 590,1940 575,1925 D2.2 682.07,1787.5 U2.8
NetD4_1: D4.1 IC5.2 L1.2 | length 490.9
  Bottom Layer w15: D4.1 1451.4,903.05 1461.63,903.05 1598.74,765.94 L1.2 1607.95,690.79 IC5.2
NetIC6_2: IC6.2 R4.2 | length 83.3
  Bottom Layer w15: IC6.2 R4.2
NetIC7_1: IC7.1 Q1.4 | length 325.4
  Bottom Layer w15: IC7.1 1062.89,1138.92 1062.89,1116.57 1083.05,1096.41 1141.54,1096.41 1241.61,996.33 Q1.4
NetIC7_2: IC7.2 R2.1 | length 124.3
  Bottom Layer w15: IC7.2 1100.3,1149.51 1100.3,1180.2 1127.6,1207.5 R2.1
NetIC7_3: IC7.3 Q1.5 | length 124.9
  Bottom Layer w15: IC7.3 1240.26,1144.21 1241.61,1145.57 Q1.5
NetIC9_2: IC9.2 R3.2 | length 92.7
  Top Layer w10: R3.2 2150,1270 IC9.2
NetJ1_15: J1.15 R7.2 | length 176.1
  Top Layer w10: J1.15 1260.16,652.76 1320,712.6 1320,720.1 1332.5,732.6 R7.2
NetJ1_26: J1.26 R5.2 | length 162.1
  Top Layer w10: R5.2 1420,695.21 1476.69,638.51 J1.26
NetLED1_2: LED1.2 LED2.4 | length 168.2
  Bottom Layer w15: LED1.2 612.91,2244.29 666.52,2297.89 666.52,2309.71 676.73,2319.92 LED2.4
NetLED2_2: LED2.2 LED3.4 | length 167.3
  Bottom Layer w15: LED2.2 893.27,2190 903.48,2200.22 903.48,2228.19 955,2279.71 LED3.4
NetLED3_2: LED3.2 LED4.4 | length 166.7
  Bottom Layer w15: LED3.2 1159.73,2190 1169.94,2200.22 1169.94,2229.65 1220,2279.71 LED4.4
NetLED4_2: LED4.2 LED5.4 | length 166.1
  Bottom Layer w15: LED4.2 1424.73,2190 1434.94,2200.22 1434.94,2230.66 1483.54,2279.26 LED5.4
NetLED5_2: LED5.2 LED6.4 | length 166.7
  Bottom Layer w15: LED5.2 1688.27,2190 1698.48,2200.22 1698.48,2229.65 1748.54,2279.71 LED6.4
NetMP3Player_Debug_2: DEBUG.2@1954.41,180 U4.15 | length 2239.6
  Bottom Layer w15: U4.15 760.93,13.4 1286.04,13.4 1394.34,121.7 1932.23,121.7 1953.8,143.26 1953.8,179.39 DEBUG.2@1954.41,180
NetMP3Player_Debug_3: DEBUG.3@1928.82,180 U4.14 | length 2654.4
  Bottom Layer w15: U4.14 33.07,641.26 33.07,810.84 63.49,841.26 106.51,841.26 351,596.77 351,458.55 772.15,37.4 1249.25,37.4 1357.55,145.7 1675.96,145.7 1754.26,224 1915.3,224 1922.62,216.67 1922.62,209.59 DEBUG.3@1928.21,204
NetQ1_1: Q1.1 Q1.8 | length 231.3
  Bottom Layer w15: Q1.1 Q1.8
NetSW1_1: SW1.1 U3.18 | length 1332.8
  Top Layer w10: U3.18 158.51,299.25 113.86,343.9 61.1,343.9 25,380 25,809.81 173,957.81 374.28,957.81 418.46,1002 418.46,1044.54 463.36,1089.43 511.12,1089.43 567.47,1145.79 SW1.1
SCL: IC9.3 J1.18 R11.1 U1.35 U2.6 | length 3862.5
  Top Layer w10: U2.6 739.84,1790.59 739.84,1813.33 814.11,1887.6 R11.1 935,1887.6 945.43,1898.03 945.43,1904.67 955.86,1915.1 1305.71,1915.1 U1.35 1530.81,1690 1615.49,1690 1699.91,1605.58 1881.26,1605.58 2109.86,1376.98 2109.86,1253.5 2132.73,1230.63 2241.54,1230.63 2261.38,1250.47 2261.38,1323.35 2240,1344.73 2240,1399.5 2260.5,1420 2289.5,1420 2334.26,1375.24 2334.26,1329.21 2340.12,1323.35 2340.12,1007.8 1872.32,540 1347.2,540 1320.12,567.08 1320.12,593.03 J1.18
SDA: IC9.4 J1.19 J1.20 R10.1 U1.36 U2.5 | length 3324.5
  Top Layer w10: U2.5 875.66,1785.75 977.5,1887.6 R10.1 1288.67,1887.6 U1.36 1599.21,1577.06 1716.35,1577.06 1942.25,1351.16 1942.25,1312.1 1976,1278.35 2010.21,1278.35 2077.77,1210.79 2255.52,1210.79 2275.36,1230.63 IC9.4 2314.37,1003.26 1869.46,558.35 1368.22,558.35 1359.49,567.08 1359.49,593.03 J1.20 J1.19
SPK+: +SPK-.1 U4.6 | length 862.7
  Bottom Layer w15: +SPK-.1 475,607.99 U4.6
SPK-: +SPK-.2 U4.8 | length 1104.1
  Bottom Layer w15: +SPK-.2 375,507.99 U4.8
TOUCH_K1: IC2.1 U1.33 | length 931.7
  Top Layer w10: IC2.1 717.4,2145.43 724.21,2138.62 775.42,2138.62 930,1984.04 930,1960.76 960.66,1930.1 1410.53,1930.1 1485.79,1854.83 1492.12,1854.83 U1.33
TOUCH_K2: IC3.1 U1.32 | length 457.1
  Top Layer w10: IC3.1 1247.4,2145.43 1254.21,2138.62 1275.89,2138.62 1534.14,1880.37 1534.14,1852.31 U1.32
TOUCH_K3: IC4.1 U1.31 | length 462
  Top Layer w10: U1.31 1556.41,1830.04 1556.41,1971.14 1693.89,2108.62 1735.95,2108.62 1758.02,2130.69 1758.02,2131.05 1772.4,2145.43 IC4.1
Vin: DEBUG.1 E6.1 IC6.4 IC6.8 PWR.A9 PWR.B9 | length 4462.5
  Bottom Layer w20: DEBUG.1@1695,255 1939.01,255 1976.89,217.12 1976.89,183.11 DEBUG.1@1980,180
  Bottom Layer w30: PWR.B9@207.76,1137.49 226.54,1137.49 257.26,1168.21 257.26,1220.36 ; PWR.B9 207.71,1150.2 176.27,1150.2 146.43,1180.04 146.43,1419.67 237.5,1510.74 407.43,1510.74 458.07,1460.1 628,1460.1 ; PWR.A9 PWR.A9 239.24,1269.8 257.26,1251.78 257.26,1220.36 ; IC6.8 660,1428.1 628,1460.1 ; E6.1 900.02,1619.66 810.34,1619.66 IC6.4 810,1748.19 743.29,1814.9 676.72,1814.9 630,1768.18 630,1658.02 628,1656.02 628,1460.1 ; DEBUG.1@1695,255 1641.54,308.46 1268.49,308.46 1221.65,261.63 1221.65,218.22 1192.69,189.25 997.31,189.25 968.35,218.22 968.35,713.8 608.68,1073.46 404.15,1073.46 257.26,1220.36
VSC: C10.2 C11.2 D3.2 IC8.2 J1.6 J1.9 J1.11 R6.2 | length 1210.1
  Top Layer w10: J1.9 1142.95,594.84 1142.95,620.8 1151.68,629.53 1171.78,629.53 1177.64,623.67 1177.64,617.4 1181.42,613.62 J1.11 ; J1.9@1142.05,613.62 1138.27,617.4 1138.27,623.67 1132.41,629.53 1092.63,629.53 1083.9,620.8 1083.9,680.57 1075,689.47 1075,749.24 1097.82,772.07 1217.18,772.07 1252.5,807.4 1186.87,873.03 D3.2 ; R6.2 1267.5,807.4 1314.37,760.53 1609.78,760.53 1615.64,754.67 1615.64,738.46 1621.5,732.6 C11.2 C10.2 IC8.2
pads on no net: CR?.0 DEBUG.4@1903.23,180 IC2.4 IC2.6 IC3.4 IC3.6 IC4.4 IC4.6 IC6.9 IC6.10 IC6.11 IC7.4 IC9.1 IC9.6 J1.7 J1.MP1 J1.MP2 LED6.2 PWR.3 PWR.A5 PWR.B5 PWR.P$4 PWR.P$5 U1.1 U1.2 U1.3 U1.7 U1.8 U1.9 U1.10 U1.11 U1.12 U1.15 U1.17 U1.20 U1.21 U1.22 U1.24 U1.26 U1.27 U1.28 U1.29 U1.30 U1.34 U1.37 U1.38 U1.42 U1.43 U1.44 U2.3 U2.7 U3.2 U3.3 U3.4 U3.5 U3.6 U3.9 U3.12 U3.13 U3.14 U3.15 U3.16 U3.17 U3.19 U4.4 U4.5 U4.9 U4.11 U4.12 U4.13 U4.16

## Polygon pours and split planes (outlines as drawn)
NetC25_1 on Top Layer "NETC25_1_L01_P000" (solid, pour order 0): 415,2355 415,2210 880,2210 880,2355
GND on Top Layer "GND_L01_P003" (solid, pour order 3): 350,2035 350,2355 105,2355 5,2255 5,105 105,5 175,5 175,190 700,190 705,185 705,5 2260,5 2355,100 2355,2260 2260,2355 2035,2355 2035,2035
NetC26_1 on Top Layer "NETC26_1_L01_P001" (solid, pour order 1): 950,2355 950,2210 1415,2210 1415,2355
NetC27_1 on Top Layer "NETC27_1_L01_P002" (solid, pour order 2): 1480,2355 1480,2210 1945,2210 1945,2355
GND on Bottom Layer "GND_L02_P007" (solid, pour order 7): 350,2035 350,2355 105,2355 10,2260 5,2260 5,100 100,5 180,5 180,190 700,190 700,5 2255,5 2350,100 2355,100 2355,2260 2260,2355 2035,2355 2035,2035

## Keep-outs
Keep-Out Layer:
  lines w10: -93.43,-93.43 -93.43,2455.63 2455.63,2455.63 2455.63,-93.43 -93.43,-93.43

## Silkscreen, mask and mechanical layers (free items; w line width, h text height)
Top Overlay:
  text "Ver 0.1" at 1920,1775.02 h60
Bottom Overlay:
  text "来日方长 / 何惧车遥马慢" at 1955,1630 h125
  text "Bibibili @是你李某人" at 2185.8,1594.7 h80 r270
  text "Github @Challenger-0" at 2099.5,1594.48 h80 r270
Top Solder:
  rectangle: 1480,2210 1945,2355
  rectangle: 950,2210 1420,2355

## Text inside footprints (layer, text, board x,y; h text height)
DEBUG: Bottom Overlay "USB" at 1988.82,50 h40